# EAGLE board tempSch (EAGLE 9.6.2)
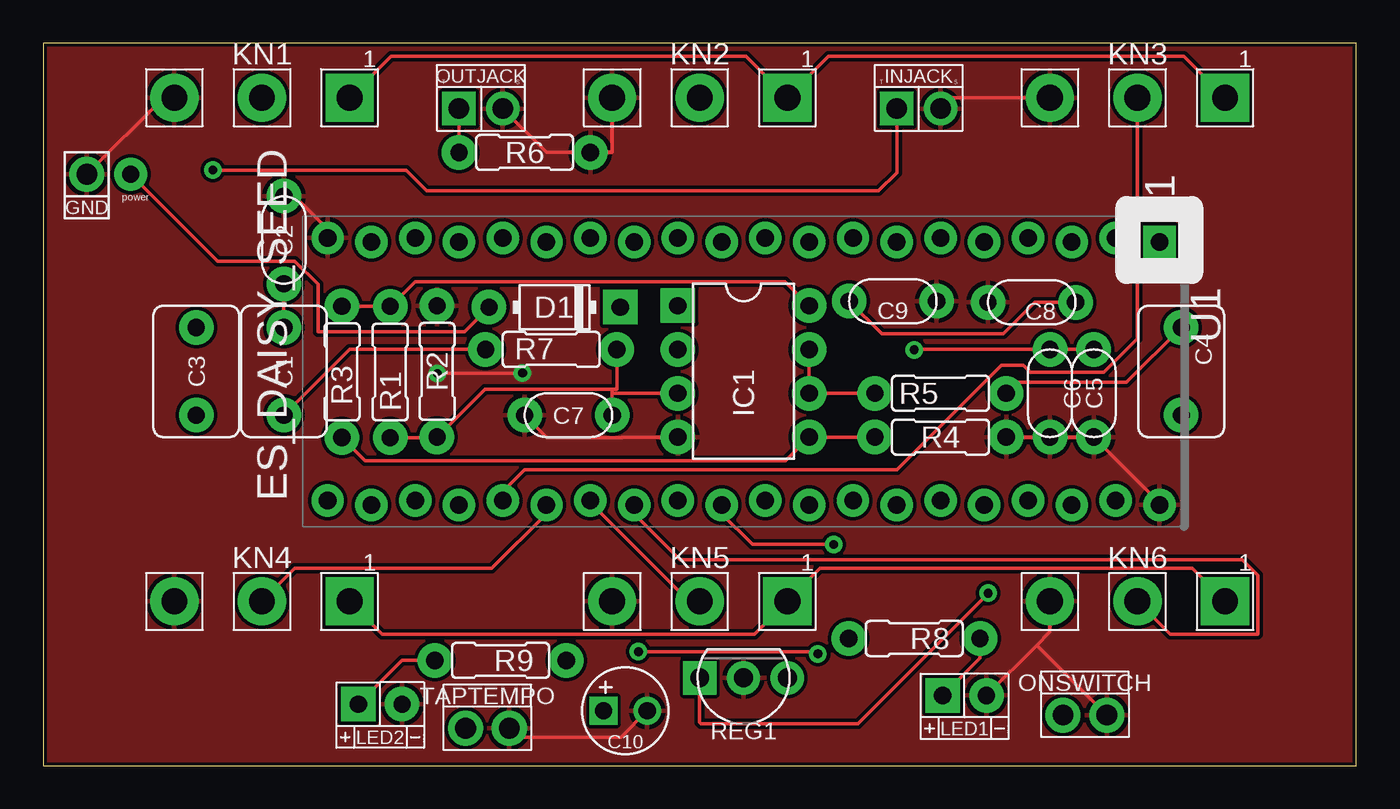
[diagram p0: board, top side]
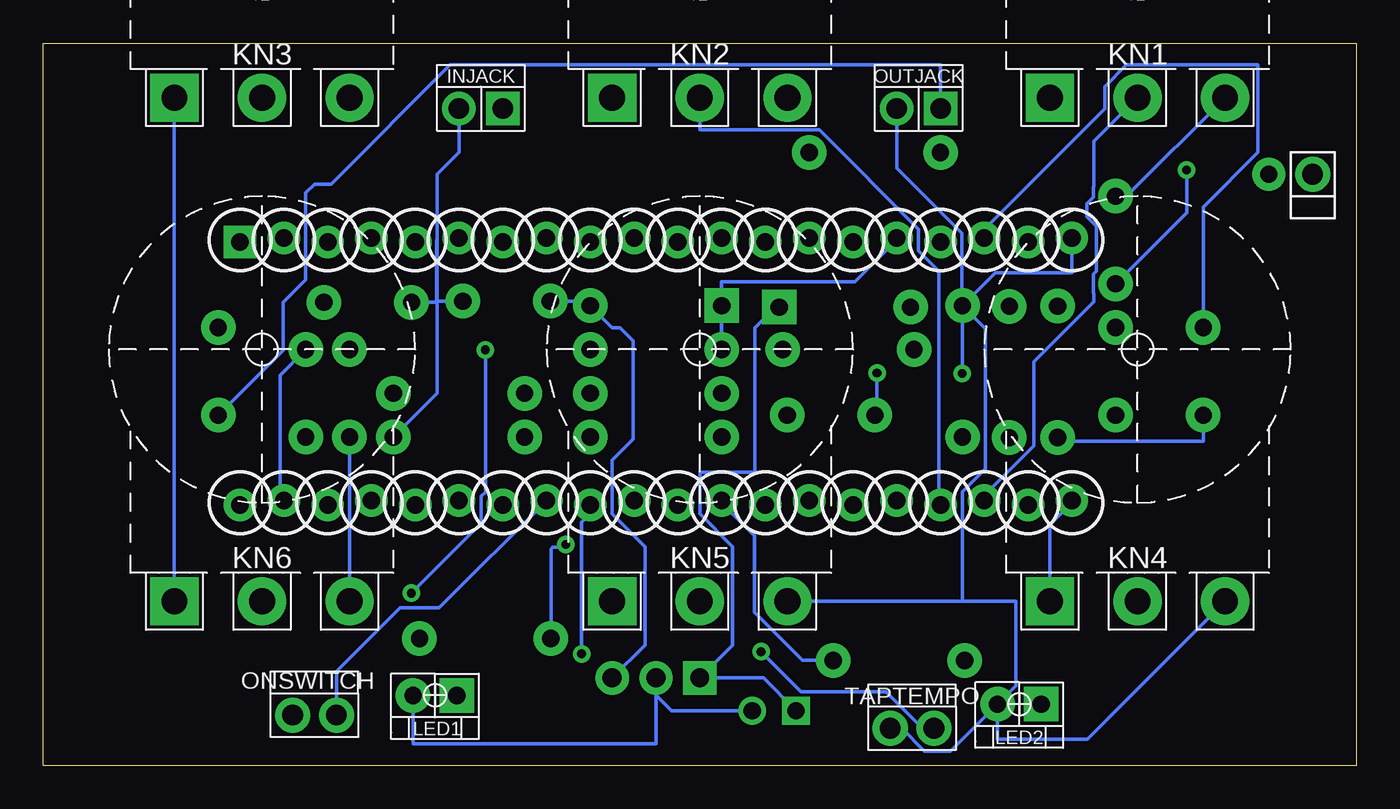
[diagram p1: board, bottom side, seen from below]

Size 76.2 x 41.9 mm. Coordinates in mm from the lower left corner, seen from the top.
Outline: 0,0 76.2,0 76.2,41.9 0,41.9 0,0
Copper layers (1*16): Top 0.035mm / dielectric 1.5mm / Bottom 0.035mm
Design rules "SparkFun": minimum track width 8mil, minimum drill 20mil, track to track 8mil, track to pad 8mil, pad to pad 8mil, via to via 8mil, smd to smd 8mil, copper to edge 8mil, drill to drill 8mil, minimum pad ring 12mil, minimum via ring 10mil, stop-mask expansion 4mil, vias tented up to drill 20mil, thermal gap 10mil

## Footprints (pad centres in the part's own frame; a part is rotated, then mirrored left to right if it is on the bottom)
0.2".LRG = drill 1 pad 2: 1 -2.54,0; 2 2.54,0
0.2".SML = drill 1 pad 2: 1 -2.54,0; 2 2.54,0
0503 = drill 1 square: + -1.27,0 | drill 1: - 1.27,0
DO41-3 = drill 1 pad 2: A 3.81,0 | drill 1 pad 2 square: C -3.81,0
PAD1 = drill 1.2 pad 2.032: 1 0,0
DIP08 = drill 1 pad 2 square: 1 -3.81,-3.81 | drill 1 pad 2: 2 -1.27,-3.81; 3 1.27,-3.81; 4 3.81,-3.81; 5 3.81,3.81; 6 1.27,3.81; 7 -1.27,3.81; 8 -3.81,3.81
2PADS = drill 1.2 pad 1.93: S 1.27,0 | drill 1.2 pad 1.93 square: T -1.27,0
16MM_C.MOUNT = drill 1.5 pad 2.794 square: 1 5.08,-14.605 | drill 1.5 pad 2.794: 2 0,-14.605; 3 -5.08,-14.605
3MM_IO = drill 1 pad 2 square: A -1.27,0 | drill 1 pad 2: K 1.27,0
SPST.MOM = drill 1.2 pad 2.032: 1 -1.27,0; 2 1.27,0
PAD2 = drill 1 pad 1.93: P$1 0,0
0.3".B = drill 1 pad 2: 1 -3.81,0; 2 3.81,0
TO92 = drill 1.1 pad 1.93 square: 1 -2.54,0 | drill 1.1 pad 1.93: 2 0,0; 3 2.54,0
ES_DAISY_SEED = drill 1.016 pad 1.88 square: 1 -7.493,24.13 | drill 1.016 pad 1.88: 2 -7.747,21.59; 3 -7.493,19.05; 4 -7.747,16.51; 5 -7.493,13.97; 6 -7.747,11.43; 7 -7.493,8.89; 8 -7.747,6.35; 9 -7.493,3.81; 10 -7.747,1.27; 11 -7.493,-1.27; 12 -7.747,-3.81; 13 -7.493,-6.35; 14 -7.747,-8.89; 15 -7.493,-11.43; 16 -7.747,-13.97; 17 -7.493,-16.51; 18 -7.747,-19.05; 19 -7.493,-21.59; 20 -7.747,-24.13; 21 7.493,-24.13; 22 7.747,-21.59; 23 7.493,-19.05; 24 7.747,-16.51; 25 7.493,-13.97; 26 7.747,-11.43; 27 7.493,-8.89; 28 7.747,-6.35; 29 7.493,-3.81; 30 7.747,-1.27; 31 7.493,1.27; 32 7.747,3.81; 33 7.493,6.35; 34 7.747,8.89; 35 7.493,11.43; 36 7.747,13.97; 37 7.493,16.51; 38 7.747,19.05; 39 7.493,21.59; 40 7.747,24.13

## Placement (x,y rotation side)
C1  1u  [0.2".LRG]  13.97,22.86 270 top
C2  100p  [0.2".SML]  13.97,30.48 90 top
C3  1u  [0.2".LRG]  8.89,22.86 90 top
C4  1u  [0.2".LRG]  66.04,22.86 90 top
C5  100n  [0.2".SML]  60.96,21.59 270 top
C6  100n  [0.2".SML]  58.42,21.59 270 top
C7  1n  [0.2".SML]  30.48,20.32 180 top
C8  100n  [0.2".SML]  57.37,26.87 180 top
C9  100n  [0.2".SML]  49.31,26.93 0 top
C10  100u  [0503]  33.78,3.17 0 top
D1  [DO41-3]  29.68,26.58 180 top
GND  PADS.RND_LBL  [PAD1]  2.54,34.29 0 top
IC1  [DIP08]  40.64,22.86 270 top
INJACK  [2PADS]  50.8,38.1 0 top
KN1  [16MM_C.MOUNT]  12.7,53.34 0 top
KN2  [16MM_C.MOUNT]  38.1,53.34 0 top
KN3  [16MM_C.MOUNT]  63.5,53.34 0 top
KN4  [16MM_C.MOUNT]  12.7,24.13 0 top
KN5  [16MM_C.MOUNT]  38.1,24.13 0 top
KN6  [16MM_C.MOUNT]  63.5,24.13 0 top
LED1  LED.1  [3MM_IO]  53.47,4.06 0 top
LED2  LED.1  [3MM_IO]  19.56,3.56 0 top
ONSWITCH  [SPST.MOM]  60.45,2.92 0 top
OUTJACK  [2PADS]  25.4,38.1 0 top
POWER  power  [PAD2]  5.08,34.29 0 top
R1  1M  [0.3".B]  20.14,22.82 90 top
R2  1M  [0.3".B]  22.86,22.86 270 top
R3  1M  [0.3".B]  17.34,22.83 90 top
R4  1M  [0.3".B]  52.07,19.05 180 top
R5  100R  [0.3".B]  52.07,21.59 0 top
R6  100k  [0.3".B]  27.94,35.56 180 top
R7  1k  [0.3".B]  29.48,24.13 180 top
R8  5k  [0.3".B]  50.55,7.37 0 top
R9  5k  [0.3".B]  26.54,6.1 180 top
REG1  LM78L.  [TO92]  40.64,5.08 0 top
TAPTEMPO  [SPST.MOM]  25.78,2.16 0 top
U1  ES_DAISY_SEED  [ES_DAISY_SEED]  40.64,22.86 270 top

## Library data of the parts
C1-C9 = caps-film
C10 = caps-elec
D1 LED1 LED2 = diodes
GND POWER = supply pins
IC1 = integrated circuits
INJACK OUTJACK = jacks
KN1-KN6 = potentiometers
ONSWITCH TAPTEMPO = switches
R1-R9 = resistors
REG1 = regulators
U1 = Electrosmith_Boards; IPN: Daisy Seed

## Nets
3V3A: KN1.1 KN2.1 KN3.1 KN4.1 KN5.1 KN6.1 U1.21
3V3D: U1.38
5V: C8.1 C9.1 IC1.8 R1.2 R3.2 REG1.3
GND: C2.2 C5.2 C6.2 C7.2 C8.2 C9.2 C10.- GND.1 IC1.4 INJACK.S KN1.3 KN2.3 KN3.3 KN4.3 KN5.3 KN6.3 LED1.K LED2.K ONSWITCH.2 OUTJACK.S R2.1 R4.1 R6.1 REG1.2 TAPTEMPO.2 U1.20 U1.40
LEFT_IN: IC1.1 IC1.2 U1.16
LEFT_OUT: C3.2 U1.18
N$1: KN1.2 U1.23
N$2: KN2.2 U1.24
N$3: KN3.2 U1.25
N$4: C1.2 R7.2
N$5: TAPTEMPO.1 U1.32
N$7: C3.1 IC1.5 R3.1 R4.2
N$8: KN4.2 U1.26
N$10: C7.1 IC1.3 R1.1 R2.2 R7.1
N$11: C1.1 C2.1 INJACK.T
N$12: KN5.2 U1.27
N$13: IC1.6 IC1.7 R5.1
N$14: C4.2 R5.2
N$15: C4.1 OUTJACK.T R6.2
N$16: R8.1 U1.30
N$17: LED1.A R8.2
N$18: KN6.2 U1.28
N$19: D1.A POWER.P$1
N$20: ONSWITCH.1 U1.33
N$21: R9.1 U1.29
N$22: LED2.A R9.2
VCC_9V: C5.1 C6.1 C10.+ D1.C REG1.1 U1.39

## Tracks (layer width: path | path; a pad name or v marks a point on that pad's centre or on a via)
3V3A
  Top 0.203: KN4.1 19.68,7.62 41.27,7.62 KN5.1 45.09,11.43 66.67,11.43 KN6.1 | KN1.1 20.18,41.13 40.78,41.13 KN2.1 45.58,41.13 66.18,41.13 KN3.1
  Bottom 0.203: KN4.1 17.78,13.97 16.51,15.24 U1.21 | KN3.1 KN6.1
5V
  Top 0.203: R3.2 20.13,26.64 R1.2 20.16,26.63 21.59,28.07 43.05,28.07 IC1.8 | C8.1 57.55,26.87 55.72,25.03 48.66,25.03 C9.1
  Bottom 0.203: REG1.3 41.27,6.99 41.27,12.7 43.18,14.61 43.18,17.7 41.96,18.93 41.96,24.63 42.73,25.4 43.18,25.4 IC1.8 44.71,26.93 C9.1
GND  (via drill 0.51)
  Top 0.203: OUTJACK.S 29.21,35.56 R6.1 33.02,35.56 KN2.3 | INJACK.S 52.7,38.73 KN3.3 | GND.1 6.99,38.73 KN1.3 | C2.2 14.61,33.02 16.51,31.11 U1.20 | R4.1 C6.2 C5.2 64.77,15.24 U1.40 | C10.- 33.53,1.65 27.56,1.65 TAPTEMPO.2 | IC1.4 33.59,19.05 33.56,19.02 29.25,19.02 C7.2 | v22.88,22.74 27.8,22.74 v27.82,22.76 | LED1.K 57.66,6.99 | 57.66,6.99 58.42,7.75 KN6.3 | ONSWITCH.2 57.66,6.99
  Bottom 0.203: INJACK.S 52.07,35.56 53.34,34.29 53.34,30.48 | R2.1 20.95,28.57 16.51,28.57 U1.20 | KN1.3 13.34,33.02 C2.2 | C6.2 KN6.3 | LED2.K 19.76,4.62 19.76,9.52 22.86,9.52 | 22.86,9.52 KN5.3 | R2.1 21.52,25.33 21.52,17.21 22.86,15.88 22.86,9.52 | 53.34,26.89 53.34,21.59 R4.1 | 53.34,26.89 53.34,30.48 | R2.1 22.86,22.86 22.84,22.84 22.84,22.78 v22.88,22.74 | v27.82,22.76 27.82,20.44 C7.2 | OUTJACK.S 26.67,34.65 22.89,30.87 22.89,26.69 R2.1 | C8.2 53.36,26.87 | 53.36,26.87 53.34,26.89 | LED1.K 54.74,1.27 40.64,1.27 REG1.2 40.64,4.06 39.75,3.17 C10.- | TAPTEMPO.2 26.38,2.16 25.06,0.84 23.55,0.84 LED2.K | KN4.3 15.62,1.52 20.83,1.52 LED2.K | 53.34,30.48 53.36,30.46 53.36,26.87 | 53.34,26.89 53.3,26.93 C9.2
  pour Top: 0.25,41.66 0.25,0.25 75.95,0.25 75.95,41.66
LEFT_IN
  Bottom 0.203: U1.16 26.67,30.48 29.08,28.07 36.83,28.07 IC1.1 IC1.2
LEFT_OUT
  Bottom 0.203: C3.2 8.89,32.39 5.71,35.56 5.71,40.64 13.34,40.64 14.61,39.37 14.61,38.1 21.59,31.11 U1.18
N$1
  Bottom 0.203: KN1.2 15.24,36.2 15.24,33.6 15.28,33.56 15.28,32.95 15.63,32.59 15.63,31.83 15.09,31.28 15.09,28.66 15.28,28.48 15.28,27.4 15.24,27.36 15.24,26.89 18.71,23.42 18.71,18.55 21.59,15.68 U1.23
N$2
  Bottom 0.203: U1.24 24.22,15.2 24.22,28.66 25.4,29.85 25.4,31.11 31.16,36.87 38.1,36.87 KN2.2
N$3
  Top 0.203: KN3.2 63.5,24.76 61.56,22.82 57.28,22.82 | U1.25 26.67,15.88 27.94,17.14 49.53,17.14 55.61,23.22 56.88,23.22 57.28,22.82 | 57.28,22.82
N$4
  Top 0.203: C1.2 17.78,24.13 R7.2
N$5  (via drill 0.51)
  Top 0.203: v34.54,6.6 44.83,6.6 v44.96,6.48
  Bottom 0.203: U1.32 44.45,14.61 44.95,14.1 v44.95,6.48 v44.96,6.48 | TAPTEMPO.1 25.18,2.16 27.31,4.28 32.23,4.28 v34.54,6.6
N$7
  Top 0.203: R4.2 IC1.5 43.07,17.67 18.69,17.67 R3.1
  Bottom 0.203: R3.1 17.14,18.82 8.89,18.82 C3.1
N$8
  Top 0.203: KN4.2 14.61,11.43 26.04,11.43 29.21,14.61 U1.26
N$10
  Top 0.203: R1.1 22.82,19.01 R2.2 25.64,21.82 33.02,21.82 | R7.1 33.29,21.82 33.02,21.82 | 33.02,21.82 33.02,21.59 | 33.02,21.59 C7.1 | 33.02,21.59 IC1.3
N$11  (via drill 0.51)
  Top 0.203: INJACK.T 49.53,34.39 48.47,33.33 22.25,33.33 21.39,34.19 21.24,34.34 21.05,34.54 v9.85,34.54 | C2.1 C1.1
  Bottom 0.203: C2.1 9.85,32.06 v9.85,34.54
N$12
  Top 0.203: KN5.2 37.47,9.52 31.75,15.24 U1.27
N$13
  Top 0.203: IC1.7 IC1.6 R5.1
N$14
  Top 0.203: R5.2 56.52,22.22 62.87,22.22 C4.2
N$15
  Top 0.203: R6.2 OUTJACK.T
  Bottom 0.203: OUTJACK.T 24.13,40.64 52.59,40.64 59.5,33.73 60.45,33.73 60.96,33.22 60.96,28.18 62.27,26.88 62.27,24.09 C4.1
N$16  (via drill 0.51)
  Top 0.203: v45.87,12.82 41.15,12.82 39.37,14.61 U1.30
  Bottom 0.203: v45.87,12.82 46.04,12.65 46.63,12.65 46.74,12.55 R8.1
N$17
  Top 0.203: LED1.A 54.36,6.22 R8.2
N$18
  Top 0.203: KN6.2 65.41,7.62 70.48,7.62 70.48,11.04 69.58,11.95 36.95,11.95 34.29,14.61 U1.28
N$19
  Top 0.203: POWER.P$1 10.12,29.25 14.61,29.25 15.95,27.9 15.95,25.16 24.45,25.16 D1.A
N$20
  Bottom 0.203: U1.33 53.21,9.14 55.5,9.14 59.18,5.46 ONSWITCH.1
N$21
  Bottom 0.203: R9.1 32.13,6.1 34.92,8.89 34.92,13.33 36.83,15.24 U1.29
N$22
  Top 0.203: R9.2 20.83,6.1 LED2.A
VCC_9V  (via drill 0.51)
  Top 0.203: C5.1 C6.1 50.56,24.13 v50.54,24.11 | v54.84,9.99 47.27,2.43 38.17,2.43 38.1,2.5 REG1.1
  Bottom 0.203: C10.+ 34.42,5.08 REG1.1 36.2,6.99 36.2,12.7 38.09,14.59 38.09,17.03 38.08,17.05 38.05,17.02 34.88,17.02 34.88,25.38 33.68,26.58 D1.C | U1.39 62.45,15.58 62.45,22.64 C5.1 | v50.54,24.11 50.54,15.86 50.77,15.63 50.77,14.05 v54.84,9.99

## Text on the board
tNames: power